# Altium PCB PCB1.PcbDoc
Units mil, origin at the board's own origin, x right, y up, seen from the top; angles counter-clockwise.
Board outline 5350 x 3500 mil, 2 copper layers (Top Layer, Bottom Layer); 12 components, 18 nets, 77 pads, 6 vias.
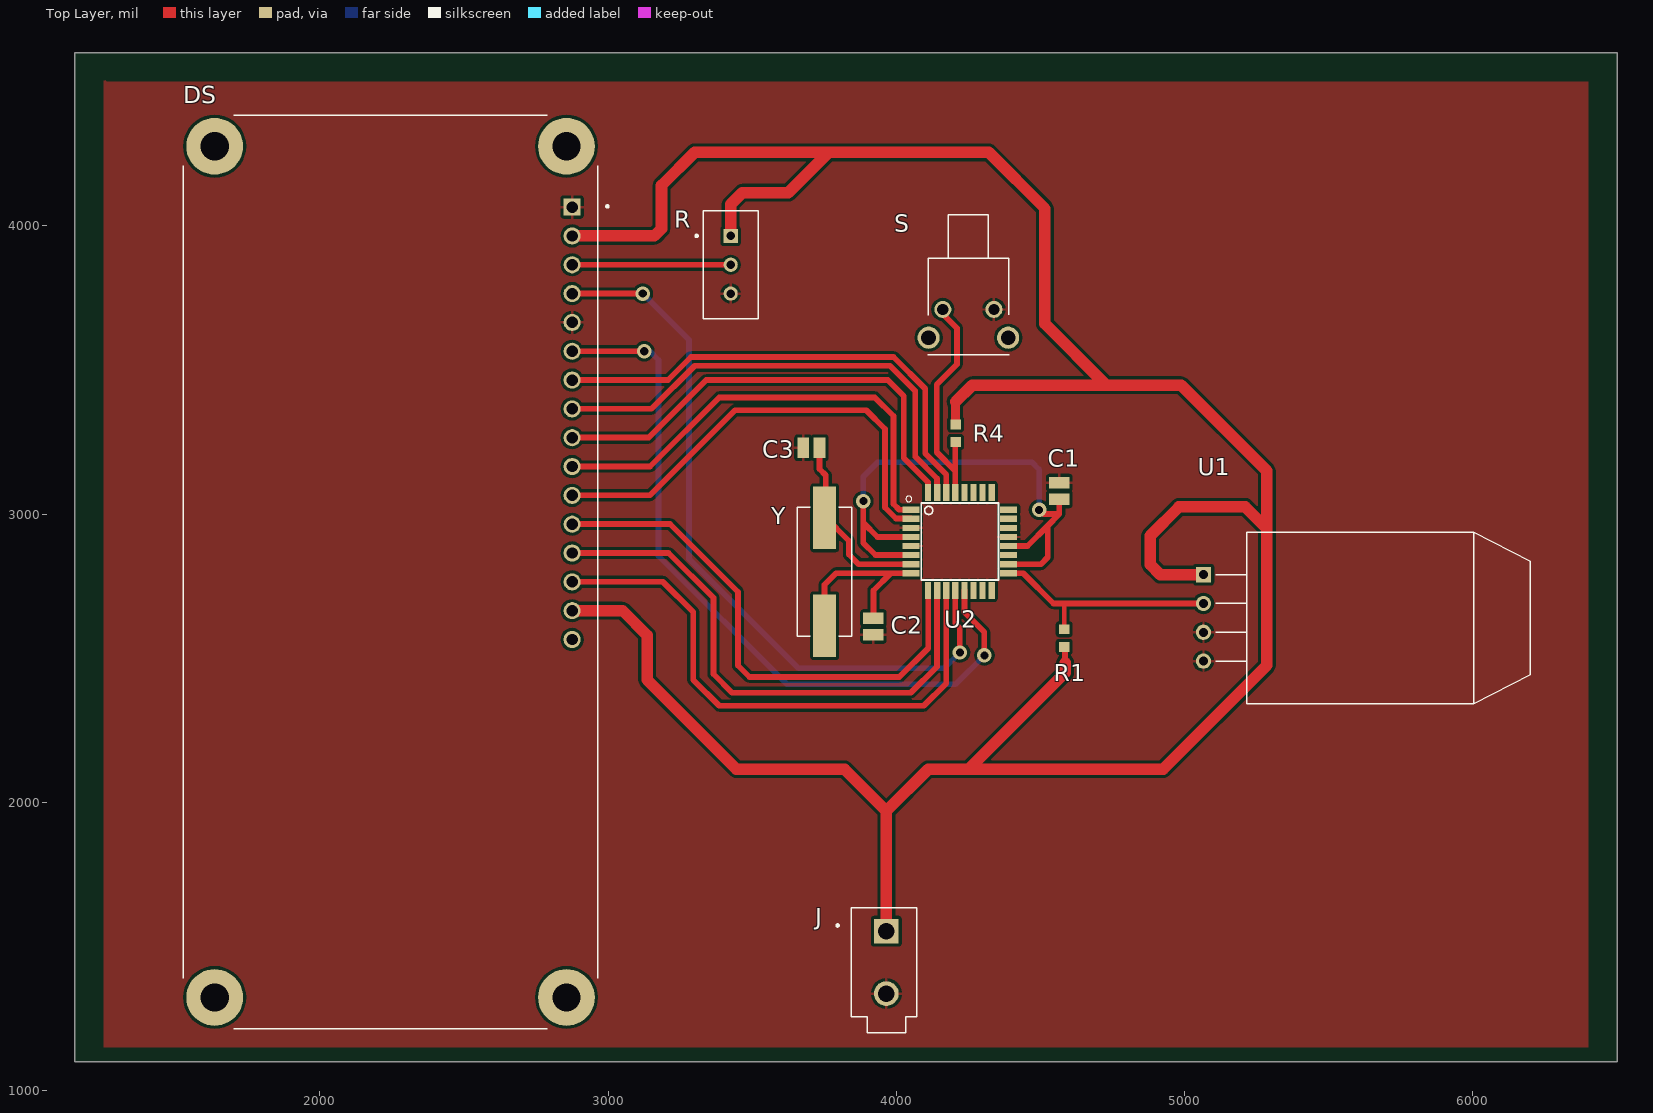
[diagram p0: Top Layer view]
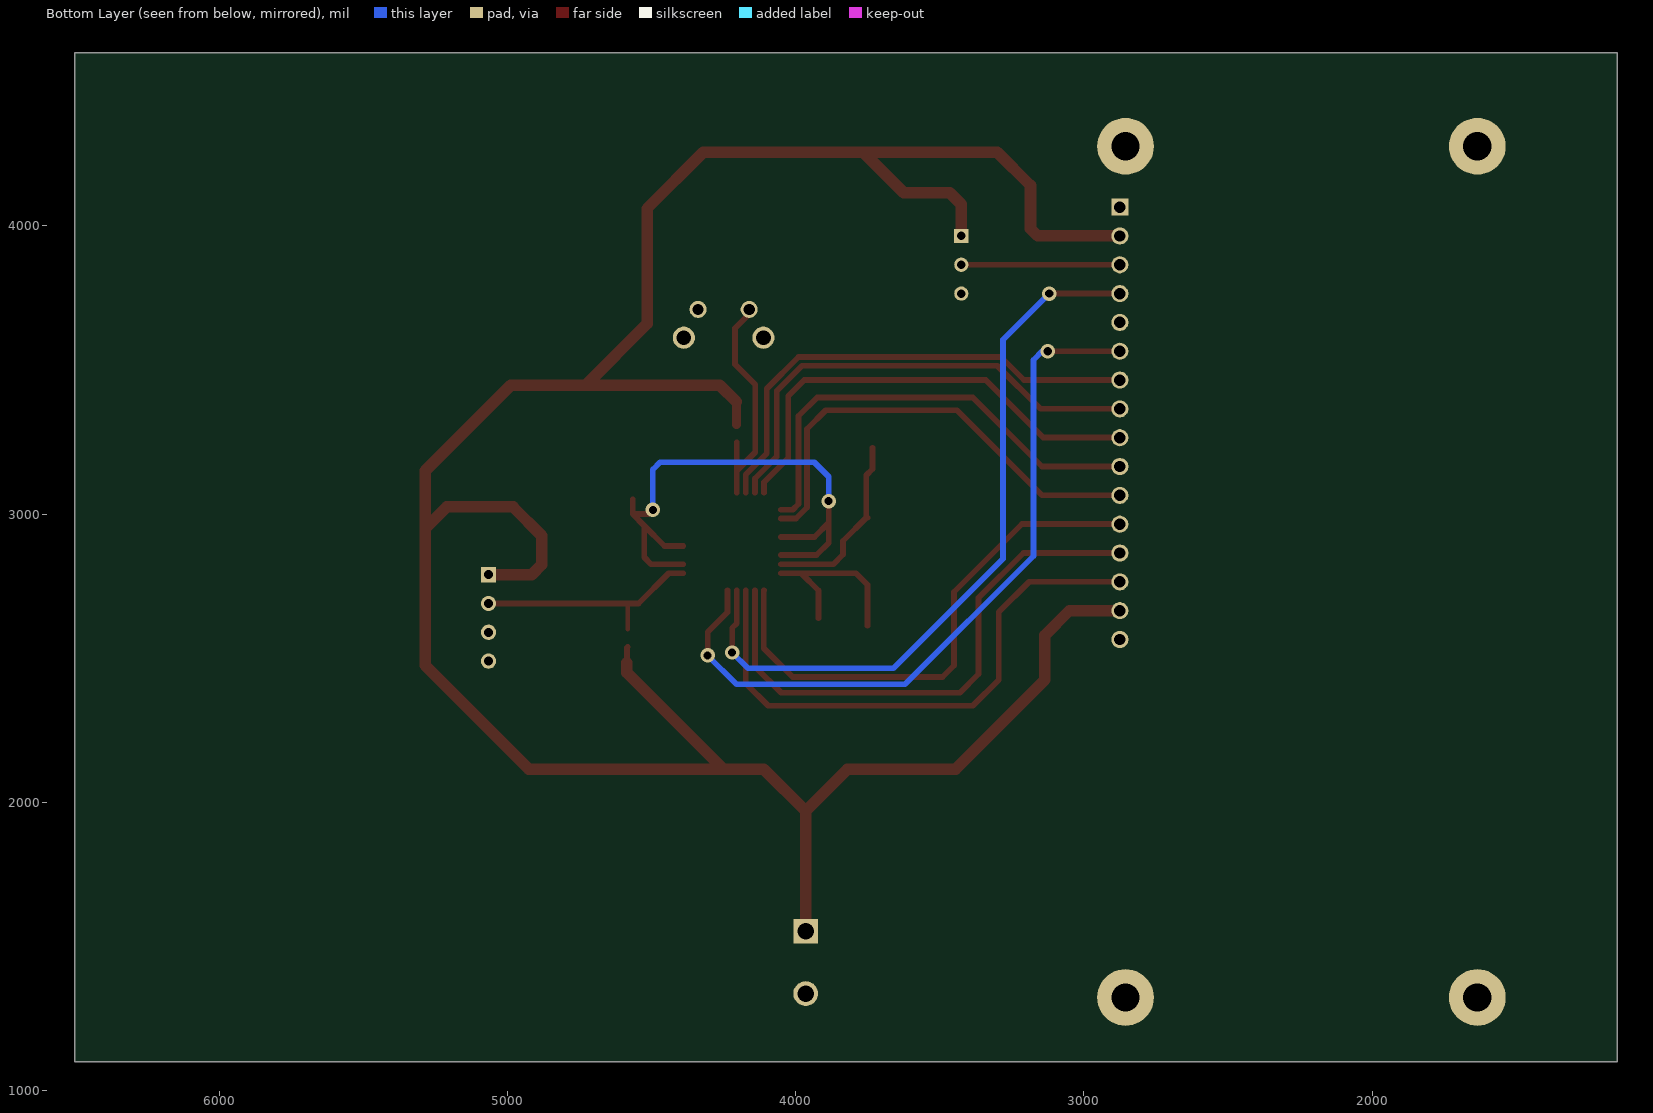
[diagram p1: Bottom Layer view, seen from below]
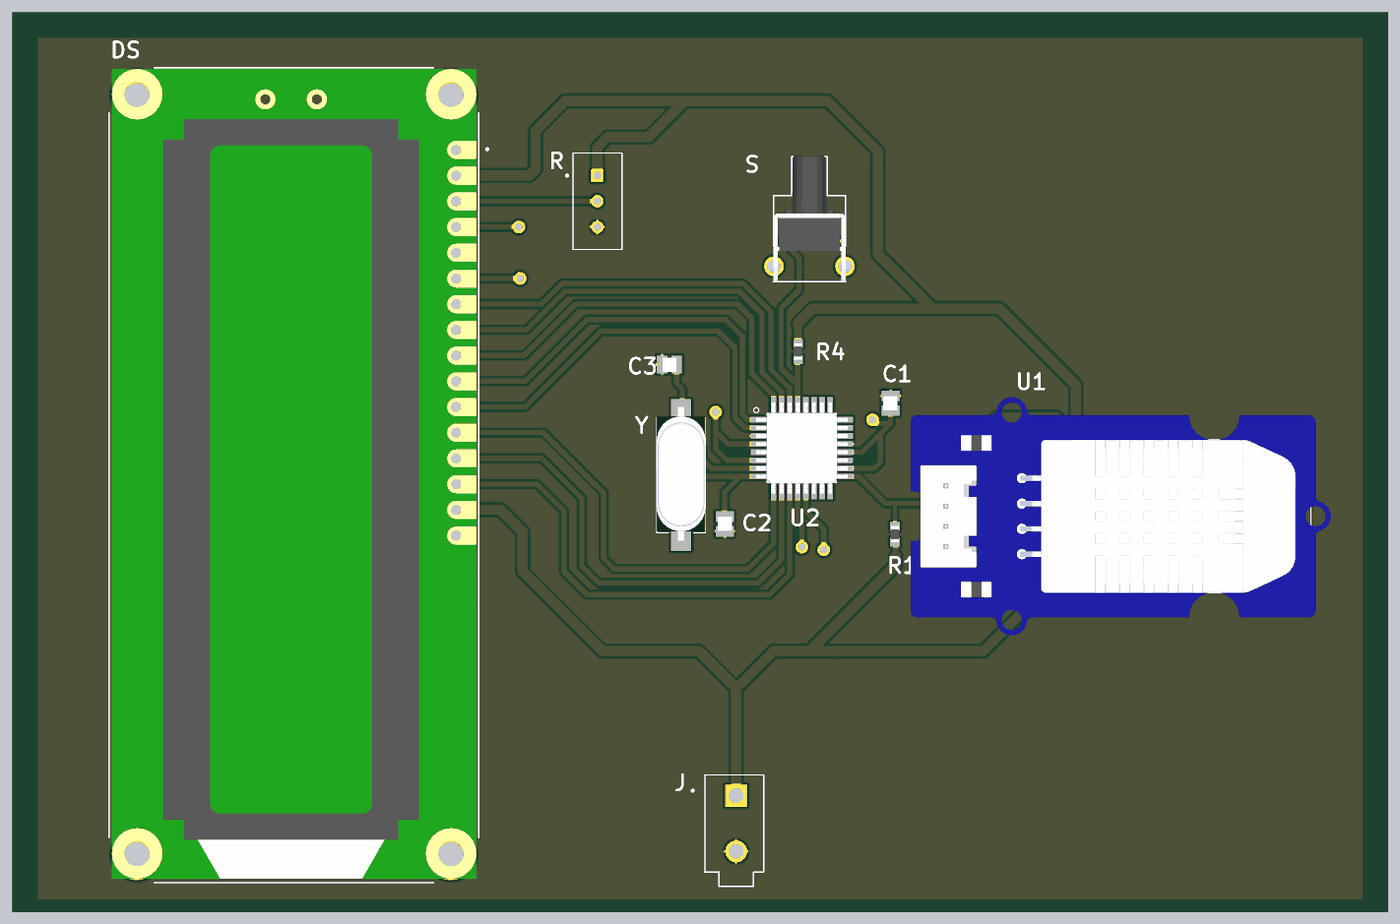
[diagram p2: 3D render of the assembled board from above, using the file's embedded part models]

## Layer stack, top to bottom
Top Solder: solder mask 0.4, Solder Resist, Dk 3.5
Top Layer: signal copper 1.4
Dielectric 1: dielectric 12.6, FR-4, Dk 4.8
Bottom Layer: signal copper 1.4
Bottom Solder: solder mask 0.4, Solder Resist, Dk 3.5

## Board outline
1150,1100 6500,1100 6500,4600 1150,4600

## Design rules (kind name [scope] priority, off if disabled: settings)
Clearance [All] p1: gap=10 ignorepadtopadclearanceinfootprint=FALSE except(0: Arc-Hole Track-Hole SMDPad-Hole THPad-Hole Via-Hole Fill-Hole Poly-Hole Region-Hole Text-Hole)
ComponentClearance [All] p1: gap=10 collisioncheckmode=3 verticalgap=0 showdistances=FALSE
PolygonConnect [All] p1: connectstyle=Relief reliefconductorwidth=10 reliefentries=4 polygonreliefangle="90 Angle" airgapwidth=10
RoutingVias [All] p1: holewidth=28 width=50 viastyle="Through Hole" minholewidth=28 minwidth=50 maxholewidth=28 maxwidth=50
SolderMaskExpansion [All] p1: expansion=4
Width [All] p1: maxlimit=100 minlimit=10 preferedwidth=30 bottomlayer_maxwidth=20 bottomlayer_prefwidth=20 minimp=50.000000 maximp=50.000000 favimp=50.000000
29 further rules are at their usual default settings.

## Components (designator, comment, footprint, x,y, rotation, side; value= is the part's Value field where it differs from the comment)
C1 "*" CAPC1414X145N 4565,3080 r270 top
C2 "*" CAPC1414X145N 3920,2610 r90 top
C3 "*" CAPC1414X145N 3705,3230 r0 top
DS "RC1602B-BIW-CSV" LCD_RC1602B-BIW-CSV 2245.08,2799.65 r270 top
J "*" MOLEX_0039296028 3965,1445 r0 top
R "*" TRIM_3296W-1-20K 3425,3865 r0 top
R1 "*" RESC1608X55N 4581.93,2570 r270 top
R4 "*" RESC1608X55N 4205,3280.43 r270 top
S "1-1825027-1" SW_1-1825027-1 4249.53,3710 r180 top
U1 "*" SNR4-2.54-25.0X15.0X7.0MM 5608.31,2640 r270 top
U2 "*" QFP80P900X900X120-32N 4220,2905 r0 top
Y "*" XTAL_ECS-180-S-5P-DN-TR 3750.75,2800.04 r270 top

## Footprints (in the part's own frame and the unit in brackets; to place one, negate y for a bottom-side part, rotate by r counter-clockwise, add the part's x,y. Pads: shape width x height; smd on the part's side, far side on the other; paste and mask are expansions set on the pad)
CAPC1414X145N [mm]
  rect 1.04x1.79 smd: 1(-0.724,0) 2(0.724,0)
  body extent -0.69,-0.75 0.71,0.7, height 1.4
LCD_RC1602B-BIW-CSV [mm]
  rect 1.508x1.508 hole 1: 1(-32.14,16)
  round 1.508 hole 1: 2(-29.6,16) 3(-27.06,16) 4(-24.52,16) 5(-21.98,16) 6(-19.44,16) 7(-16.9,16) 8(-14.36,16) 9(-11.82,16) 10(-9.28,16) 11(-6.74,16) 12(-4.2,16) 13(-1.66,16) 14(0.88,16) 15(3.42,16) 16(5.96,16)
  round 5 hole 2.5: S1(-37.5,15.5) S2(37.5,15.5) S3(37.5,-15.5) S4(-37.5,-15.5)
  silkscreen extent -40.25,-18.25 40.25,19.2, body extent -40.13,-17.97 39.87,18.03, height 10.5
MOLEX_0039296028 [mm]
  rect 2.175x2.175 hole 1.45: 1(0,2.75)
  round 2.175 hole 1.45: 2(0,-2.75)
  silkscreen extent -4.4,-6.2 2.7,4.8
QFP80P900X900X120-32N [mm]
  rect 1.5x0.55 smd: 1(-4.3,2.8) 2(-4.3,2) 3(-4.3,1.2) 4(-4.3,0.4) 5(-4.3,-0.4) 6(-4.3,-1.2) 7(-4.3,-2) 8(-4.3,-2.8) 17(4.3,-2.8) 18(4.3,-2) 19(4.3,-1.2) 20(4.3,-0.4) 21(4.3,0.4) 22(4.3,1.2) 23(4.3,2) 24(4.3,2.8)
  rect 0.55x1.5 smd: 9(-2.8,-4.3) 10(-2,-4.3) 11(-1.2,-4.3) 12(-0.4,-4.3) 13(0.4,-4.3) 14(1.2,-4.3) 15(2,-4.3) 16(2.8,-4.3) 25(2.8,4.3) 26(2,4.3) 27(1.2,4.3) 28(0.4,4.3) 29(-0.4,4.3) 30(-1.2,4.3) 31(-2,4.3) 32(-2.8,4.3)
  silkscreen extent -4.75,-3.4 3.4,4, body extent -4.5,-4.5 4.5,4.5, height 1.06
RESC1608X55N [mm]
  rect 0.87x0.93 smd: 1(-0.78,0) 2(0.78,0)
  body extent -0.8,-0.4 0.8,0.4, height 0.56
SNR4-2.54-25.0X15.0X7.0MM [mm]
  rect 1.35x1.35 hole 0.8: P$1(-3.81,-13.8)
  round 1.35 hole 0.8: P$2(-1.27,-13.8) P$3(1.27,-13.8) P$4(3.81,-13.8)
  silkscreen extent -7.55,-12.7 7.55,15, body extent -11.74,-24.54 11.74,16.96, height 11.01
SW_1-1825027-1 [mm]
  round 1.498 hole 0.99: 1(-2.25,0) 2(2.25,0)
  round 1.95 hole 1.3: S1(-3.505,2.49) S2(3.505,2.49)
  silkscreen extent -3.58,-8.35 3.58,4.01, body extent -4.2,-8.46 4.2,3.91, height 6.01
TRIM_3296W-1-20K [mm]
  rect 1.248x1.248 hole 0.74: 1(0,2.54)
  round 1.248 hole 0.74: 2(0,0) 3(0,-2.54)
  silkscreen extent -3.1,-4.76 2.42,4.76
XTAL_ECS-180-S-5P-DN-TR [mm]
  rect 5.5x2 smd: 1(-4.75,0) 2(4.75,0)
  silkscreen extent -5.7,-2.4 5.7,2.4, body extent -6.73,-2.4 6.47,2.4, height 4.31

## Part data
C1 C2 C3: library part SQCAEM200JATWE, "CAP CER 20PF 150V 0505", Package="1414 AVX", Availability=Unavailable, MF=AVX, MP=SQCAEM200JATWE, Price=None, SnapEDA_Link=https://www.snapeda.com/parts/SQCAEM200JATWE/AVX/view-part/1673362/?ref=snap
DS: "Display: LCD; alphanumeric; STN Negative; 16x2; blue; LED; PIN: 16", Package=None, Availability=Unavailable, MF=Raystar, MP=RC1602B-BIW-CSV, Price=None, SnapEDA_Link=https://www.snapeda.com/parts/RC1602B-BIW-CSV/Raystar/view-part/581171/?ref=snap
J: library part 0039296028, "Connector Header Through Hole 2 position", Package=None, Availability=Unavailable, MF=Molex, MP=0039296028, Price=None, SnapEDA_Link=https://www.snapeda.com/parts/0039296028/Molex/view-part/2751623/?ref=snap
R: library part 3296W-1-20K, "Res Trimmer 20K Ohm 10% 1/2W 25Turn 2.19mm Pin Thru-Hole Tube", Package=None, Availability=Unavailable, MF=Bourns, MP=3296W-1-20K, Price=None, SnapEDA_Link=https://www.snapeda.com/parts/3296W-1-20K/Bourns/view-part/459266/?ref=snap
R1 R4: library part CSR0603JT27L0, "RES 0.027 OHM 5% 1/8W 0603", Package="1608 Rohm Semiconductor", Availability=Unavailable, MF="Stackpole Electronics Inc", MP=CSR0603JT27L0, Price=None, SnapEDA_Link=https://www.snapeda.com/parts/CSR0603JT27L0/Stackpole%20Electronics%20Inc/view-part/3958255/?ref=snap
S: "Switch Push Button OFF _ON_ SPST Round Button 0.05A 24VDC Momentary Contact PC Pins Thru-Hole", Package=None, Availability=Unavailable, EU_RoHS_Compliance=Compliant, MF="TE Connectivity", MP=1-1825027-1, Price=None, SnapEDA_Link=https://www.snapeda.com/parts/1-1825027-1/TE%20Connectivity%20ALCOSWITCH%20Switches/view-part/394875/?ref=snap, TE_purchase_URL=https://www.te.com/usa-en/product-1-1825027-1.html?te_bu=Cor&te_type=disp&te_campaign=seda_glo_cor-seda-global-disp-prtnr-fy19-seda-model-bom-cta_sma-317_1&elqCampaignId=32493
U1: library part TEM-HUM-AM2302(4P-25.0X15.0MM), "AM2302/DHT22 Humidity, Temperature Sensor mikroBUS™ Click™ Platform Evaluation Expansion Board", Package="Housed Sensor Seeed Technology", Availability=Unavailable, MF="Seeed Technology", MP=AM2302, Price=None, SnapEDA_Link=https://www.snapeda.com/parts/AM2302/Seeed%20Technology%20Co.%2C%20Ltd/view-part/1087537/?ref=snap
U2: library part ATMEGA328-AU, "AVR AVR® ATmega Microcontroller IC 8-Bit 20MHz 32KB _16K x 16_ FLASH 32-TQFP _7x7_", Package="TQFP-32 Microchip", Availability=Unavailable, MF=Microchip, MP=ATMEGA328-AU, Price=None, SnapEDA_Link=https://www.snapeda.com/parts/ATMEGA328-AU/Microchip/view-part/1227240/?ref=snap
Y: library part ECS-180-S-5P-DN-TR, "Crystals 18MHz", Package="HC49/US ECS International", Availability=Unavailable, MF="ECS International", MP=ECS-180-S-5P-DN-TR, Price=None, SnapEDA_Link=https://www.snapeda.com/parts/ECS-180-S-5P-DN-TR/ECS%20International/view-part/2547669/?ref=snap

## Via types
v1: diameter 50, hole 28, Top Layer to Bottom Layer, 6 vias

## Nets (pads, with @x,y where several pads share a name; then routed paths per layer and width w, separated by ;. In a path a pad name is that pad's centre, name@x,y a point inside that pad or via, vN(x,y) a via of type N, cw(c..) or ccw(c..) an arc to the next point about the centre after c; other vN are vias at no path point)
DATA: R1.1 U1.P$2 U2.17 | length 809.7
  Top Layer w15: R1.1 4581.93,2686.93 4585,2690
  Top Layer w20: U2.17 4440.24,2794.76 4545,2690 4585,2690 U1.P$2
DB0: DS.7 U2.30 | length 1694.5
  Top Layer w20: DS.7 2875.35,3465.35 3207.93,3465.35 3287.57,3545 3990,3545 4100,3435 4100,3210 4172.76,3137.24 U2.30
DB1: DS.8 U2.31 | length 1673.2
  Top Layer w20: DS.8 2875.35,3365.35 3150.35,3365.35 3300,3515 3977.57,3515 4065,3427.57 4065,3199.41 4140.59,3123.82 4140.59,3074.96 U2.31
DB2: DS.9 U2.32 | length 1626.4
  Top Layer w20: DS.9 2875.35,3265.35 3140.35,3265.35 3340,3465 3970,3465 4025,3410 4025,3195 4109.76,3110.24 U2.32
DB3: DS.10 U2.1 | length 1615.2
  Top Layer w20: DS.10 2875.35,3165.35 3145.35,3165.35 3385,3405 3925,3405 3990,3340 3990,3035 4009.76,3015.24 U2.1
DB4: DS.11 U2.2 | length 1613.3
  Top Layer w20: DS.11 2875.35,3065.35 3145.35,3065.35 3440,3360 3895,3360 3960,3295 3960,3022.57 3998.16,2984.41 4050.04,2984.41 U2.2
DB5: DS.12 U2.9 | length 1846.4
  Top Layer w20: DS.12 2875.35,2965.35 3214.65,2965.35 3450,2730 3450,2475 3490,2435 4010,2435 4110,2535 4110,2735.47 U2.9
DB6: DS.13 U2.10 | length 1924.9
  Top Layer w20: DS.13 2875.35,2865.35 3209.65,2865.35 3365,2710 3365,2445 3430,2380 4050,2380 4140.59,2470.59 4140.59,2735.04 U2.10
DB7: DS.14 U2.11 | length 1969
  Top Layer w20: DS.14 2875.35,2765.35 3189.65,2765.35 3295,2660 3295,2425 3385,2335 4095,2335 4172.76,2412.76 U2.11
GND: C1.1 C2.1 C3.1 DS.1 DS.5 J.2 R.3 S.1 U1.P$3 U1.P$4 U2.3 U2.5 U2.21
NetC1_2: C1.2 U2.4 U2.6 U2.18 U2.20 | length 1985.2
  Top Layer w20: v1(3885,3045) 3885,2970 ; U2.6 3927.24,2857.76 3885,2900 3885,2970 ; U2.4 3934.25,2920.75 3885,2970 ; U2.18 4501.26,2826.26 4525,2850 4525,2960 ; U2.20 4454.25,2889.25 4525,2960 ; v1(4495,3015) 4510,3000 4565,3000 ; C1.2 4565,3000 ; 4525,2960 4565,3000
  Bottom Layer w20: v1(3885,3045) 3885,3130 3935,3180 4470,3180 4495,3155 v1(4495,3015)
NetC2_2: C2.2 U2.8 Y.2 | length 639.7
  Top Layer w20: Y.2 3750.75,2755.28 3790.24,2794.76 3980,2794.76 ; C2.2 3920,2734.76 3980,2794.76 ; U2.8 3980,2794.76
NetC3_2: C3.2 U2.7 Y.1 | length 646.5
  Top Layer w20: C3.2 3733.5,3156.5 3755,3135 3755,2991.3 Y.1@3752.85,2989.15 ; Y.1 Y.1@3752.85,2989.15 ; U2.7 3868.74,2826.26 3835,2860 3835,2907.01 Y.1@3752.85,2989.15
NetR4_2: R4.2 S.2 U2.29 | length 811.7
  Top Layer w10: R4.2@4204.25,3248.98 R4.2
  Top Layer w20: S.2 4160.94,3694.06 4210,3645 4210,3520 4140,3450 4140,3214.25 4204.25,3150 ; U2.29 4204.25,3150 ; R4.2@4204.25,3248.98 4204.25,3150
PB0: DS.4 U2.12 | length 2574
  Top Layer w20: DS.4 2875.35,3765.35 3119.65,3765.35 v1(3120,3765) ; U2.12 4204.25,2620.75 4220,2605 v1(4220,2520)
  Bottom Layer w20: v1(3120,3765) 3280,3605 3280,2845 3660,2465 4165,2465 v1(4220,2520)
PB1: DS.6 U2.13 | length 2602.9
  Top Layer w20: DS.6 2875.35,3565.35 2944.92,3565.35 2945.28,3565 v1(3125,3565) ; U2.13 4235.75,2659.25 4305,2590 v1(4305,2510)
  Bottom Layer w20: v1(3125,3565) 3145,3565 3175,3535 3175,2855 3620,2410 4205,2410 v1(4305,2510)
V0: DS.3 R.2 | length 550.3
  Top Layer w20: DS.3 2875.35,3865.35 3424.65,3865.35 R.2
VCC: DS.2 DS.15 J.1 R1.2 R4.1 R.1 U1.P$1 | length 9890.9
  Top Layer w20: R1.2 4585,2536.22 4585,2485
  Top Layer w30: R4.1 4205,3390
  Top Layer w40: DS.15 2875.35,2665.35 3049.65,2665.35 3135,2580 3135,2425 3445,2115 3820,2115 3965,1970 ; DS.2 2875.35,3965.35 3160.35,3965.35 3185,3990 3185,4140 3300,4255 3765,4255 ; R.1 3425,4075 3465,4115 3625,4115 3765,4255 ; J.1 3965,1970 ; 4205,3390 4262.5,3447.5 4727.5,3447.5 ; 4585,2485 4585,2450 4250,2115 ; U1.P$1 4915,2790 4880,2825 4880,2925 4980,3025 5210,3025 5285,2950 ; 3765,4255 4320,4255 4515,4060 4515,3660 4727.5,3447.5 ; 3965,1970 4110,2115 4250,2115 ; 4250,2115 4925,2115 5285,2475 5285,2950 ; 4727.5,3447.5 4987.5,3447.5 5285,3150 5285,2950
pads on no net: DS.16 DS.S1 DS.S2 DS.S3 DS.S4 S.S1 S.S2 U2.14 U2.15 U2.16 U2.19 U2.22 U2.23 U2.24 U2.25 U2.26 U2.27 U2.28

## Polygon pours and split planes (outlines as drawn)
GND on Top Layer "GND plane" (solid, pour order 6): 1250,4510 1260,4500 6400,4500 6400,1150 1250,1150